# Altium PCB SwimmingPool.PcbDoc
Units mil, origin at the board's own origin, x right, y up, seen from the top; angles counter-clockwise.
Board outline 2482.28 x 2480.58 mil, 2 copper layers (Top Layer, Bottom Layer); 44 components, 29 nets, 173 pads, 74 vias.
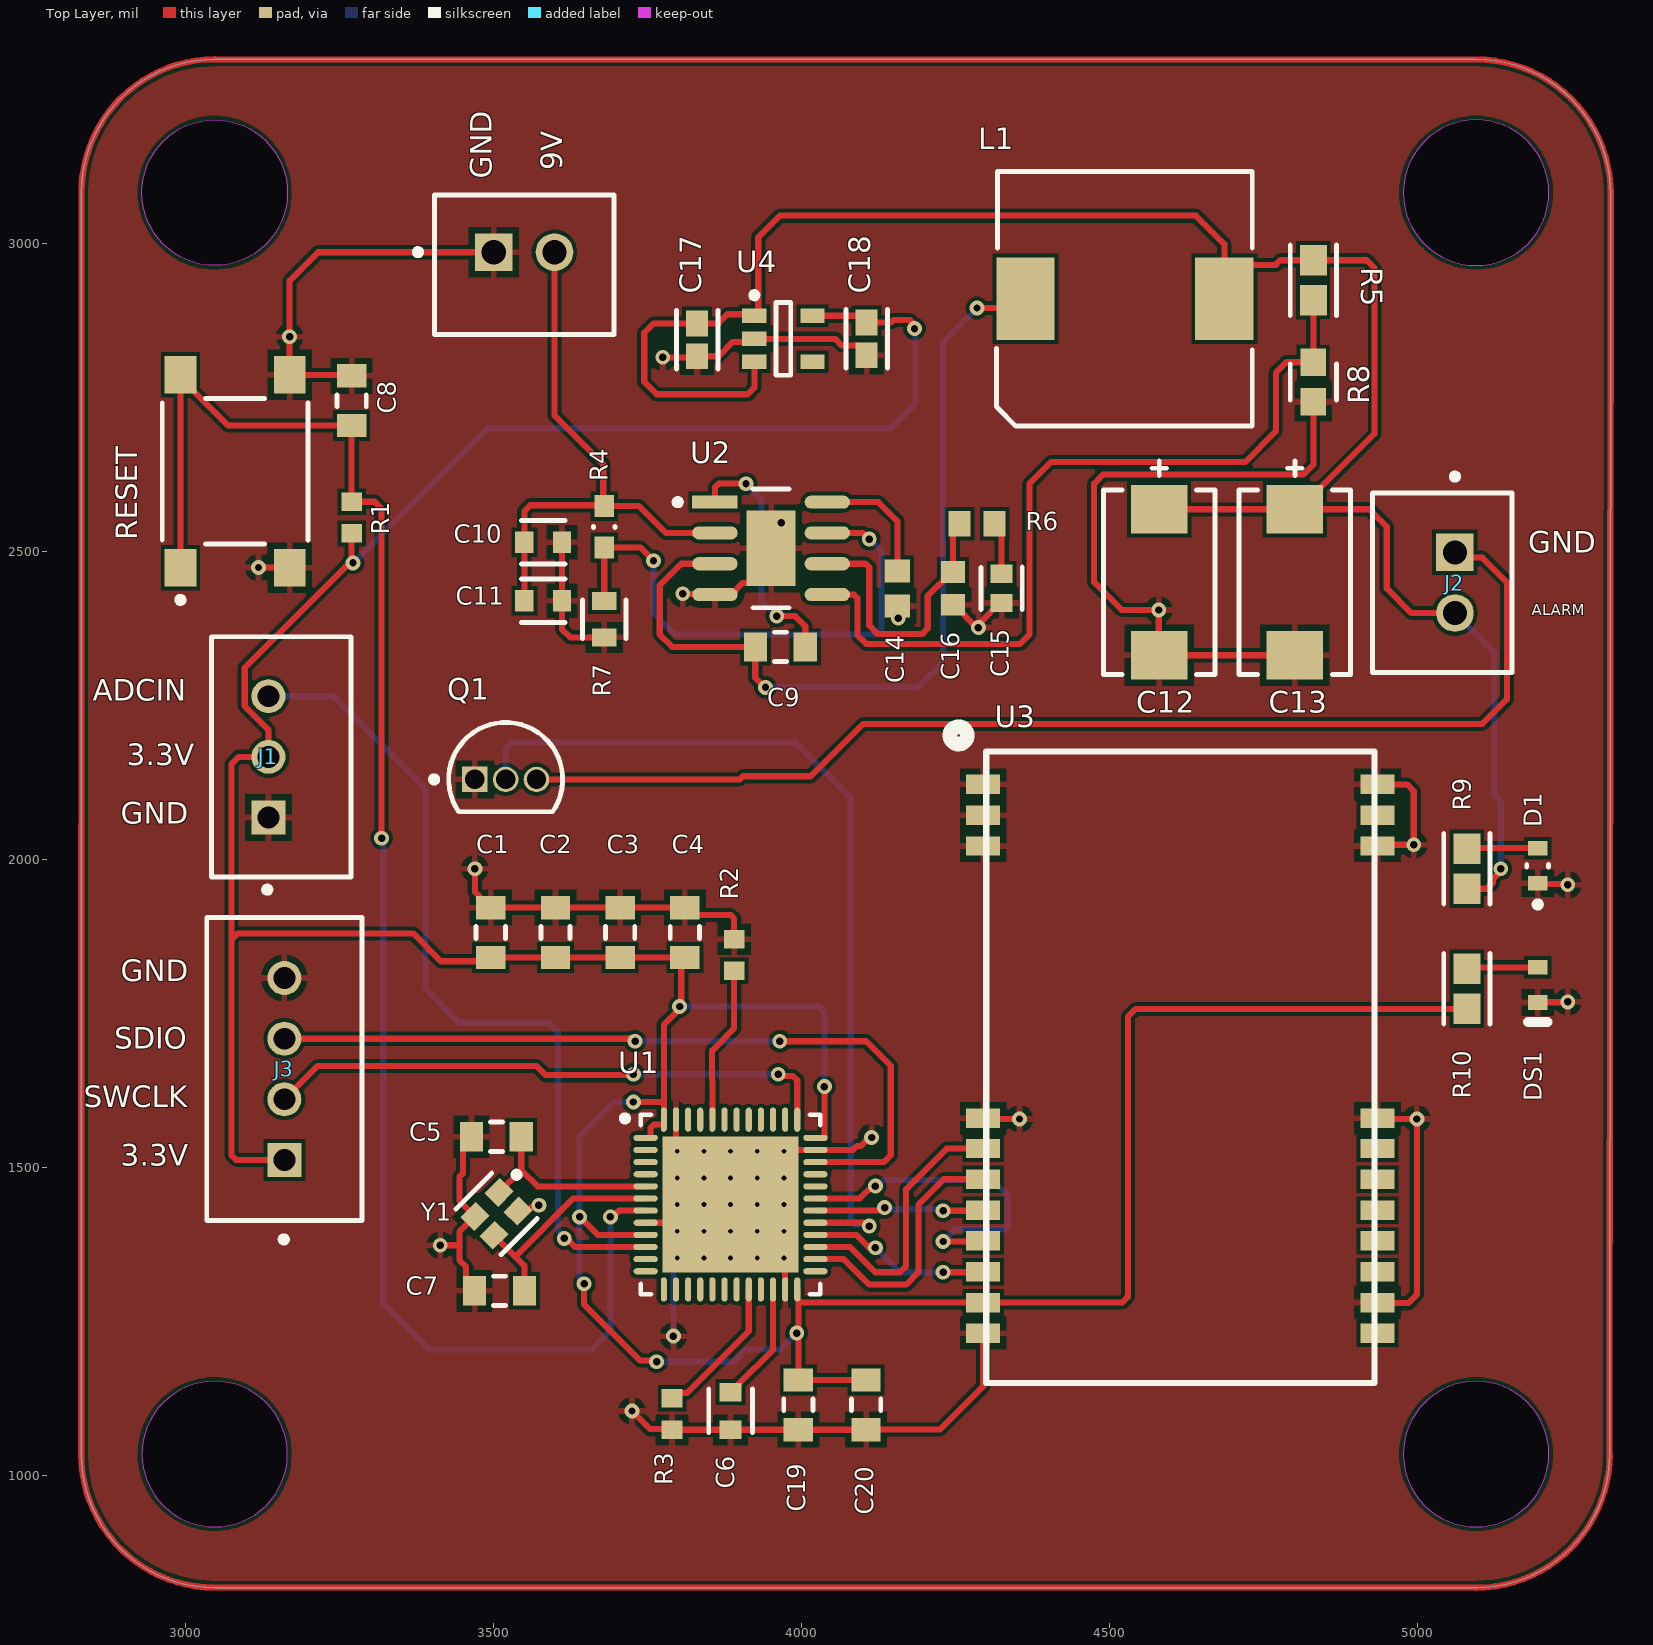
[diagram p0: Top Layer view]
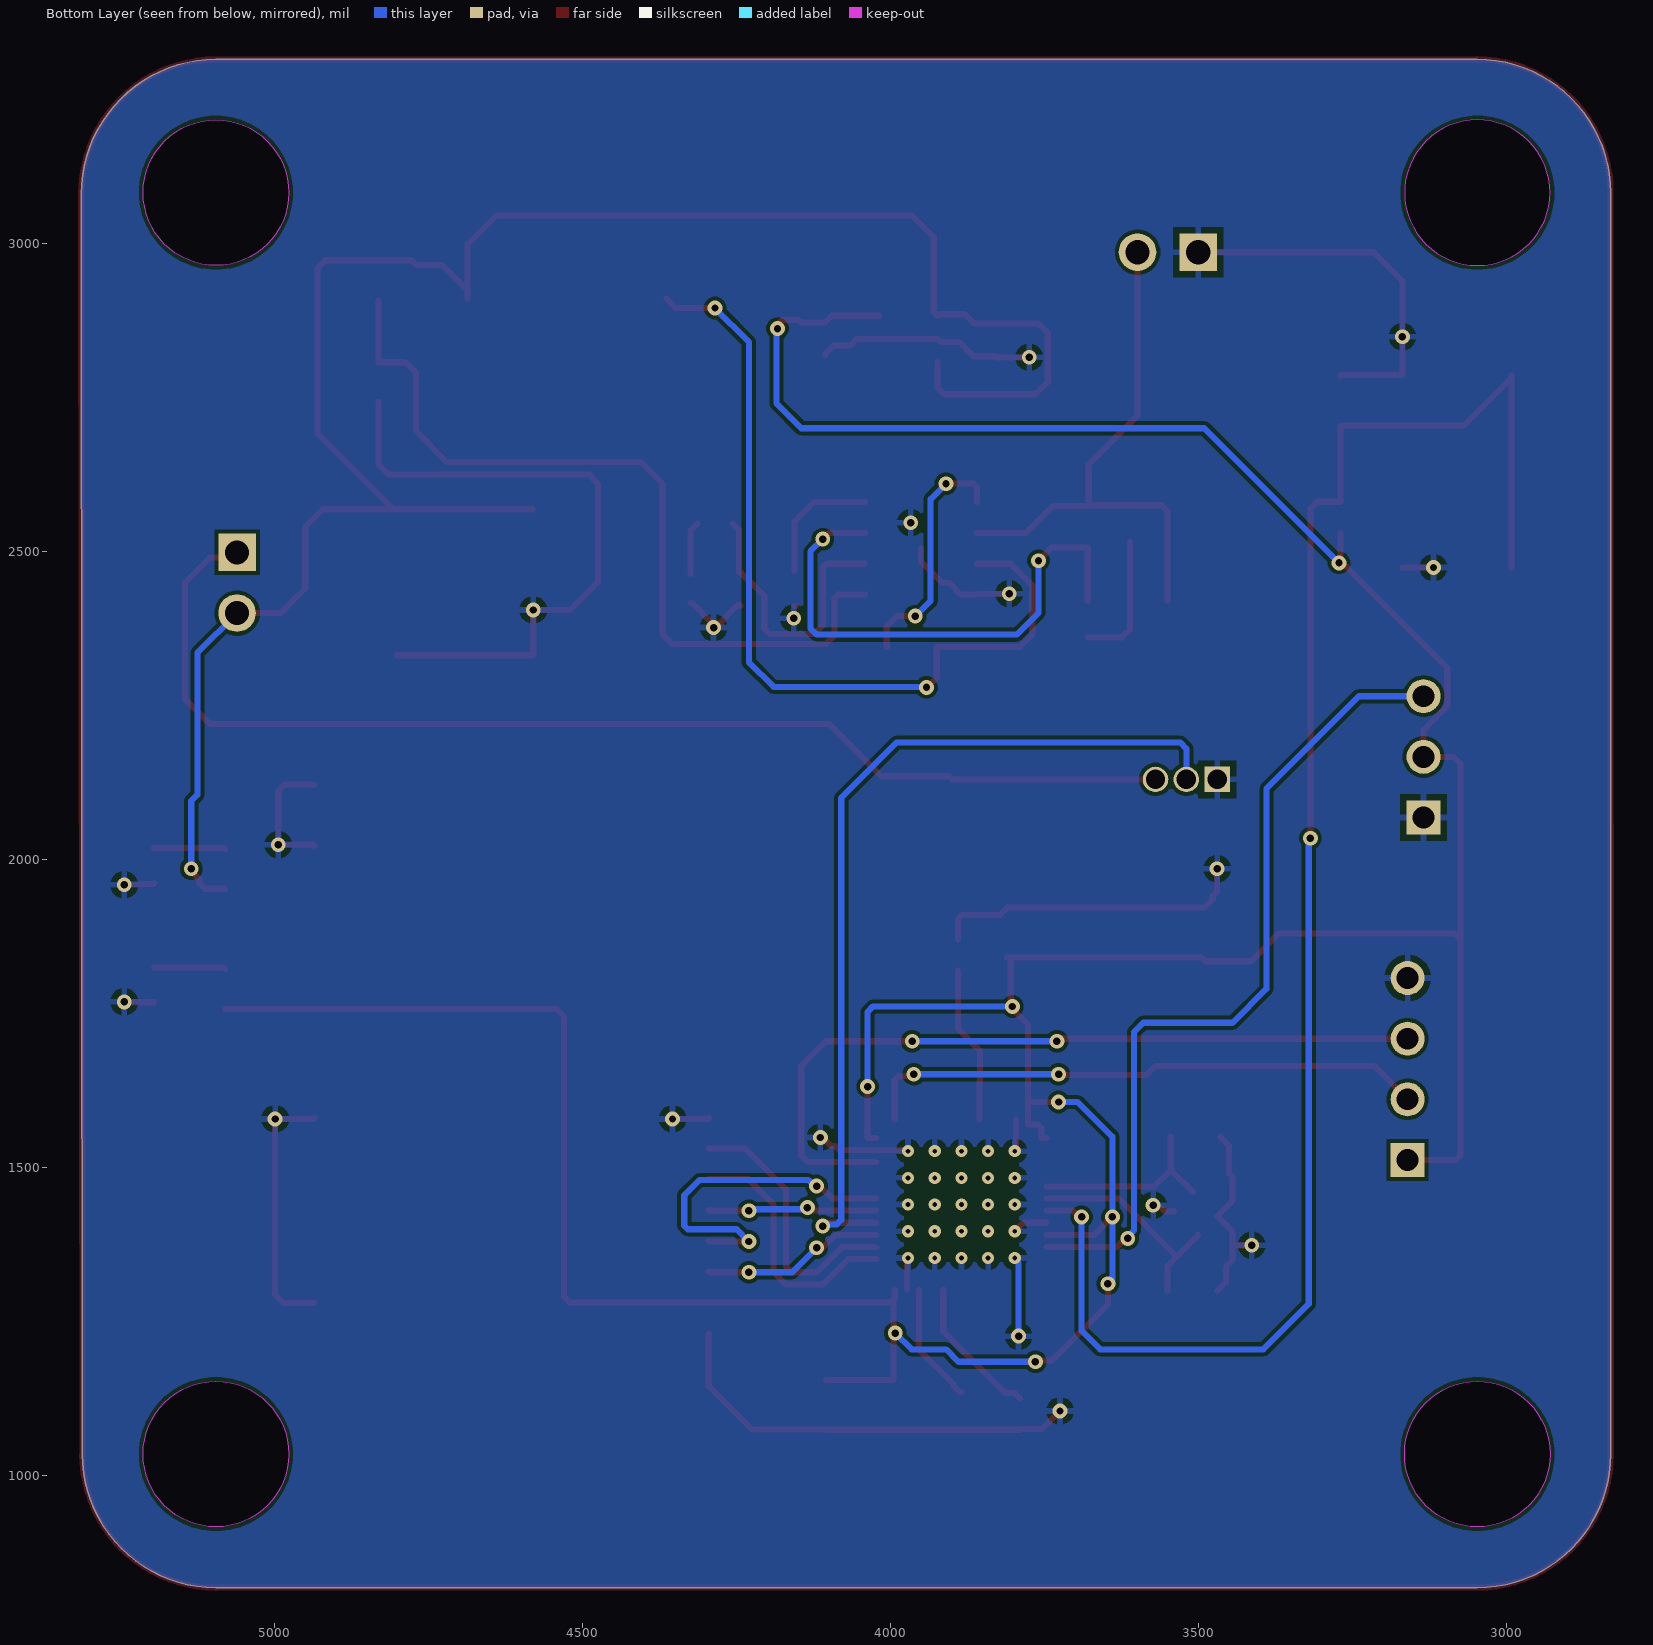
[diagram p1: Bottom Layer view, seen from below]
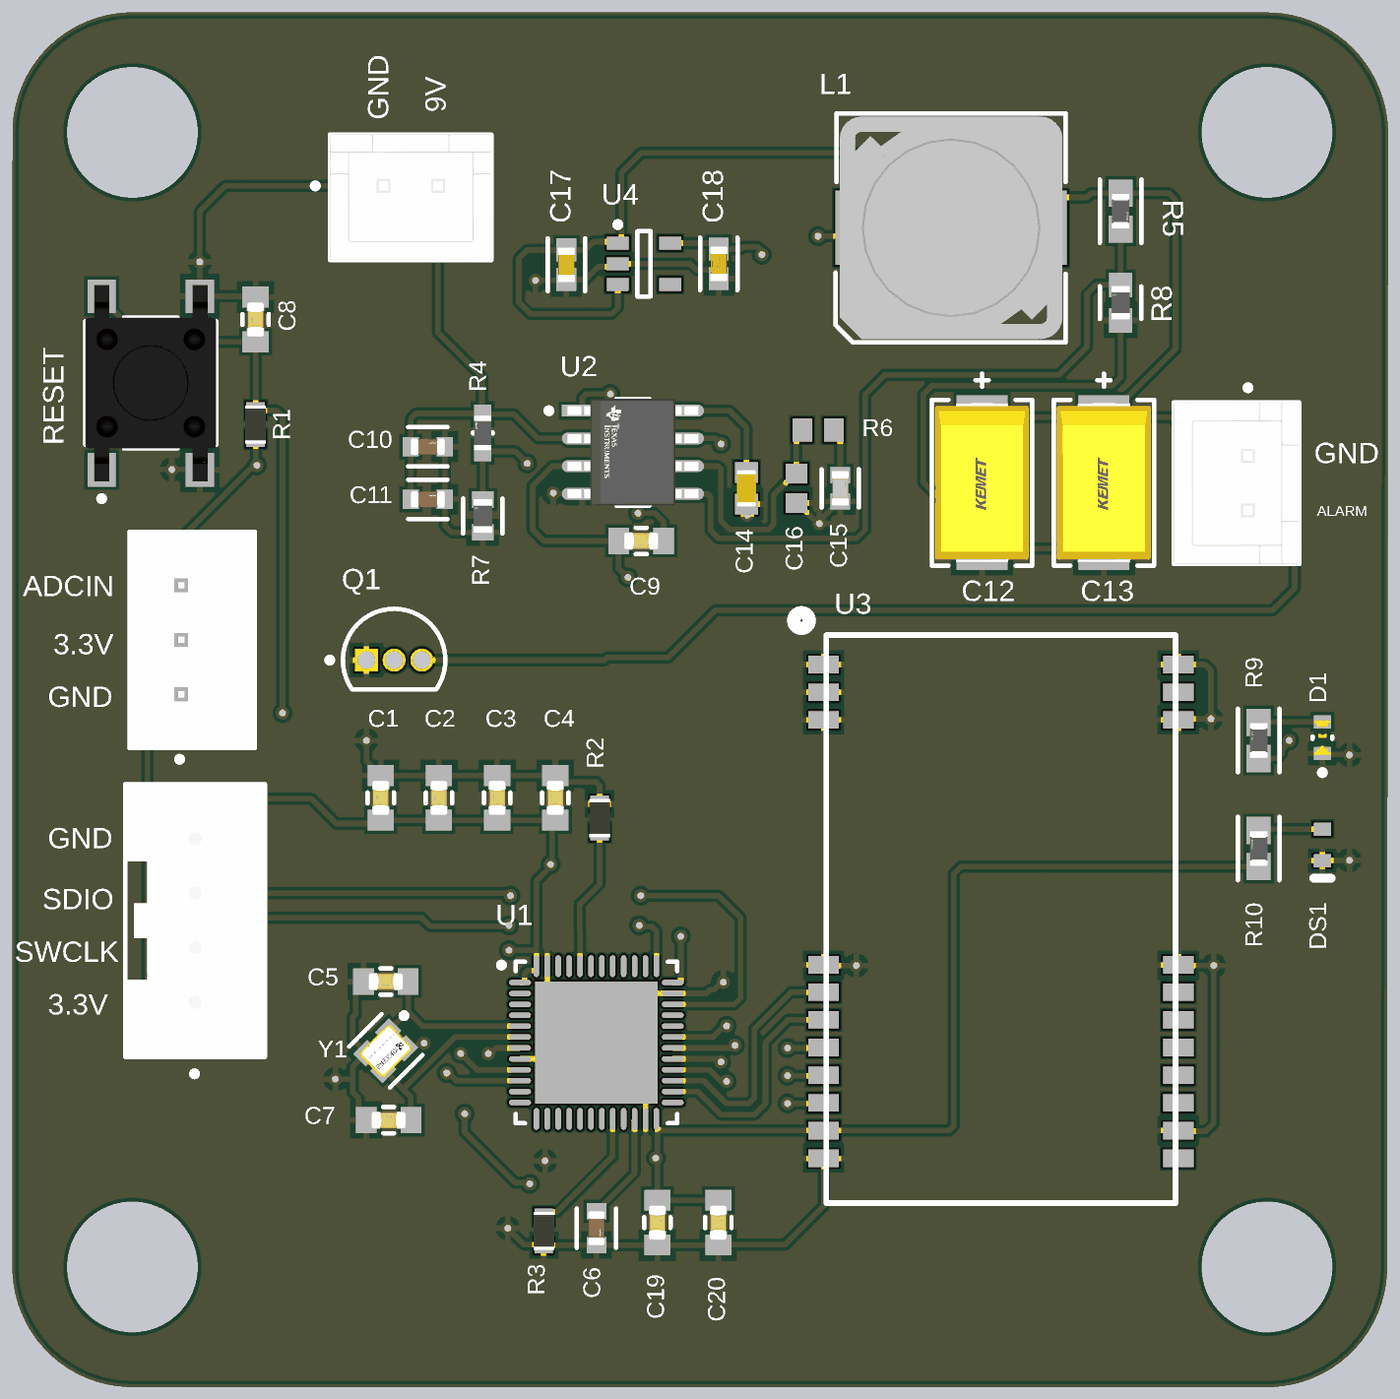
[diagram p2: 3D render of the assembled board from above, using the file's embedded part models]

## Layer stack, top to bottom
Top Solder: solder mask 0.4, Solder Resist, Dk 3.5
Top Layer: signal copper 1.4
Dielectric 1: dielectric 12.6, FR-4, Dk 4.8
Bottom Layer: signal copper 1.4
Bottom Solder: solder mask 0.4, Solder Resist, Dk 3.5

## Board outline
2831.22,1034.71 ccw(c3047.61,1034.71) 3047.61,818.32 5095,818.19 ccw(c5095,1035) 5311.81,1035 5311.53,1035 5313.5,3079.95 ccw(c5094.95,3079.95) 5094.95,3298.5 3048.19,3298.77 ccw(c3048.19,3082.07) 2831.5,3082.07
cut-out: 4976.89,1035 ccw(c5095,1035) 5095,916.89 ccw(c5095,1035) 5213.11,1035 ccw(c5095,1035) 5095,1153.11 ccw(c5095,1035)
cut-out: 3047.76,2964.13 cw(c3047.76,3082.24) 2929.65,3082.24 cw(c3047.76,3082.24) 3047.76,3200.35 cw(c3047.76,3082.24) 3165.87,3082.24 cw(c3047.76,3082.24)
cut-out: 2929.65,1035 ccw(c3047.76,1035) 3047.76,916.89 ccw(c3047.76,1035) 3165.87,1035 ccw(c3047.76,1035) 3047.76,1153.11 ccw(c3047.76,1035)
cut-out: 4976.89,3082.24 ccw(c5095,3082.24) 5095,2964.13 ccw(c5095,3082.24) 5213.11,3082.24 ccw(c5095,3082.24) 5095,3200.35 ccw(c5095,3082.24)

## Design rules (kind name [scope] priority, off if disabled: settings)
Clearance [All] p1: gap=5.98 ignorepadtopadclearanceinfootprint=FALSE except(0: Arc-Hole Track-Hole SMDPad-Hole THPad-Hole Via-Hole Fill-Hole Poly-Hole Region-Hole Text-Hole)
PolygonConnect [All] p1: connectstyle=Relief reliefconductorwidth=10 reliefentries=4 polygonreliefangle="90 Angle" airgapwidth=10
RoutingVias [All] p1: holewidth=12.01 width=24.02 viastyle="Through Hole" minholewidth=12.01 minwidth=24.02 maxholewidth=24 maxwidth=50
SolderMaskExpansion [All] p1: expansion=4 istentingtop=FALSE
Width [All] p1: maxlimit=100 minlimit=5 preferedwidth=10 minimp=50.000000 maximp=50.000000 favimp=50.000000
30 further rules are at their usual default settings.

## Classes and differential pairs
component class TPS54336ADDA: 9V C9 C10 C11 C12 C13 C14 C15 C16 C17 C18 D1 DS1 L1 R4 R5 R6 R7 R8 R9 R10 U2 U4
component class STM32F401: C1 C2 C3 C4 C5 C6 C7 C8 J1 J2 J3 Q1 R1 R2 R3 RESET U1 Y1
component class E49400T20S: C19 C20 U3

## Components (designator, comment, footprint, x,y, rotation, side; value= is the part's Value field where it differs from the comment)
9V "B2B-XH-A(LF)(SN)" FP-B2B-XH-A_LF_SN-MFG 3550,2965 r0 top (schematic designator J4)
C1 "100nF" FP-CGA3E-0_3-0_1-IPC_A 3495.83,1881.5 r90 top
C2 "100nF" FP-CGA3E-0_3-0_1-IPC_A 3600.83,1881.5 r90 top
C3 "100nF" FP-CGA3E-0_3-0_1-IPC_A 3705.83,1881.5 r90 top
C4 "100nF" FP-CGA3E-0_3-0_1-IPC_A 3810.83,1881.5 r90 top
C5 "8pF" FP-CGA3E-0_3-0_1-IPC_A 3505,1550 r180 top
C6 "22uF" FP-GRM188-0_2-MFG 3885,1105 r270 top
C7 "8pF" FP-CGA3E-0_3-0_1-IPC_A 3510,1300 r0 top
C8 "100nF" FP-CGA3E-0_3-0_1-IPC_A 3270,2744.65 r90 top
C9 "100nF" FP-CGA3E-0_3-0_1-IPC_A 3965.83,2345 r180 top
C10 "10uF" FP-GRM188-0_2-MFG 3580.83,2515 r0 top
C11 "10uF" FP-GRM188-0_2-MFG 3580.83,2420 r0 top
C12 "47uf" FP-T491D476K025AT-MFG 4580.83,2450 r90 top
C13 "47uF" FP-T491D476K025AT-MFG 4800.83,2450 r90 top
C14 "10nF" CAPC1608X90X35ML10T15 4155.83,2440 r90 top
C15 "12nF" FP-C0603C-CF-MFG 4325,2440 r270 top value="12,000 pF"
C16 "120pF" CAPC1608X87X35NL15T15 4245.83,2440 r90 top
C17 "1uF" FP-0603-L_1_6_0_1-W_0_8_0-IPC_B 3830.83,2843.34 r90 top
C18 "1uF" FP-0603-L_1_6_0_1-W_0_8_0-IPC_B 4105.83,2845 r90 top
C19 "100nF" FP-CGA3E-0_3-0_1-IPC_A 3995,1115 r270 top
C20 "100nF" FP-CGA3E-0_3-0_1-IPC_A 4105,1115 r270 top
D1 "TLMP1100-GS08" FP-6_541-5056_01-4-MFG 5195,1990 r90 top
DS1 "TLMS1100-GS08" VISH-TLMX1100_V 5195,1796.46 r270 top
J1 "B3B-XH-A(LF)(SN)" FP-B3B-XH-A_LF_SN-MFG 3155.67,2166.57 r90 top
J2 "B2B-XH-A(LF)(SN)" FP-B2B-XH-A_LF_SN-MFG 5040,2449.17 r270 top
J3 "B04B-XASK-1(LF)(SN)" FP-B04B-XASK-1_LF_SN-MFG 3160.83,1660 r270 top
L1 "1.8uH" WE-PDF-1045 4525,2910 r0 top
Q1 "2N3904" ONSC-TO-92-3-29-11 3520,2130 r0 top
R1 "10k" RESC1609X55X30LL15T15 3270,2555 r270 top
R2 "10k" RESC1609X55X30LL15T15 3890.83,1845 r270 top
R3 "10k" RESC1609X55X30LL15T15 3790,1100 r90 top
R4 "100k" FP-RC0603-0_55-MFG 3680,2540 r90 top
R5 "100k" FP-ERA3A-IPC_A 4830.83,2940 r270 top
R6 "3.74k" RESC1608X55X30ML15T15 4285,2545 r180 top
R7 "15k" FP-CRCW0603-e3-MFG 3680,2390 r90 top
R8 "19k" FP-CRCW0603-e3-IPC_A 4830.83,2775 r90 top
R9 "100k" FP-ERA3A-IPC_A 5080,1985 r90 top
R10 "100k" FP-ERA3A-IPC_A 5080,1790 r90 top
RESET "PTS645SH50SMTR92LFS" FP-PTS645SH50SMTR92LFS-MFG 3080.83,2630 r90 top (schematic designator SW1)
U1 "STM32F401CBU6" STM-UFQFPN48_M 3885,1440 r0 top
U2 "TPS54336ADDA" FP-DDA0008E-IPC_C 3950.83,2505 r0 top
U3 "E49400T20S" PCBComponent_1 4615,1676.42 r0 top
U4 "AP7343" SOT95P245X110-5N 3970.83,2845 r0 top
Y1 "CX2016DB40000D0FLJCC" FP-CX2016DB-MFG 3505,1425 r225 top

## Footprints (in the part's own frame and the unit in brackets; to place one, negate y for a bottom-side part, rotate by r counter-clockwise, add the part's x,y. Pads: shape width x height; smd on the part's side, far side on the other; paste and mask are expansions set on the pad)
CAPC1608X87X35NL15T15 [mm] "Chip Capacitor, 2-Leads, Body 1.60x0.80mm, IPC Medium Density"
  rect 0.9x1 smd: 1(-0.675,0) 2(0.675,0)
  body extent -0.87,-0.48 0.87,0.47, height 0.87
CAPC1608X90X35ML10T15 [mm] "Chip Capacitor, 2-Leads, Body 1.7x0.9mm, IPC Low Density"
  rect 0.95x1.05 smd: 1(-0.725,0) 2(0.725,0)
  body extent -0.85,-0.45 0.85,0.45, height 0.9
FP-6_541-5056_01-4-MFG [mm]
  rect 0.6x0.8 smd paste+0 mask+0: 1(-0.725,0) 2(0.725,0)
  silkscreen extent -1.72,-0.45 0.05,0.45, body extent -1.12,-0.55 1.12,0.55, height 0.25
FP-0603-L_1_6_0_1-W_0_8_0-IPC_B [mil]
  rect 41.64x35.91 smd paste+0 mask+0: 1(-26.66,0) 2(26.66,0)
  silkscreen extent -47,-34 47,34, body extent -57,-28 57,28, height 10
FP-B2B-XH-A_LF_SN-MFG [mm]
  rect 1.55x1.55 hole 1 paste-1000 mask+0: 1(-1.25,0.525)
  round 1.55 hole 1 paste-1000 mask+0: 2(1.25,0.525)
  silkscreen extent -4.5,-2.88 3.7,2.88, body extent -3.8,-2.98 3.8,2.98, height 0.25
FP-B3B-XH-A_LF_SN-MFG [mm]
  rect 1.4x1.4 hole 0.9 paste-1000 mask+0: 1(-2.5,0.525)
  round 1.4 hole 0.9 paste-1000 mask+0: 2(0,0.525) 3(2.5,0.525)
  silkscreen extent -5.6,-2.88 4.95,2.88, body extent -5.05,-2.98 5.05,2.98, height 0.25
FP-B04B-XASK-1_LF_SN-MFG [mm]
  rect 1.4x1.4 hole 0.9 paste-1000 mask+0: 1(3.75,0)
  round 1.4 hole 0.9 paste-1000 mask+0: 2(1.25,0) 3(-1.25,0) 4(-3.75,0)
  silkscreen extent -6.25,-3.2 7.15,3.2, body extent -6.35,-3.3 6.35,3.3, height 0.25
FP-C0603C-CF-MFG [mm]
  rect 0.75x0.9 smd paste+0 mask+0: 1(-0.6,0) 2(0.6,0)
  silkscreen extent -0.87,-0.85 0.88,0.85, body extent -1.2,-0.6 1.2,0.6, height 0.25
FP-CGA3E-0_3-0_1-IPC_A [mm]
  rect 0.956x1.206 smd paste+0 mask+0: 1(-1.025,0) 2(1.025,0)
  silkscreen extent -0.25,-0.6 0.25,0.6, body extent -2,-1.1 2,1.1, height 0.25
FP-CRCW0603-e3-IPC_A [mil]
  rect 44.69x41.82 smd paste+0 mask+0: 1(-32.1,0) 2(32.1,0)
  silkscreen extent -30,-37 30,37, body extent -74,-41 74,41, height 10
FP-CRCW0603-e3-MFG [mm]
  rect 0.75x1 smd paste+0 mask+0: 1(-0.75,0) 2(0.75,0)
  silkscreen extent -0.8,-0.9 0.8,0.9, body extent -1.22,-0.6 1.22,0.6, height 0.25
FP-CX2016DB-MFG [mm]
  rect 0.9x0.8 smd paste+0 mask+0: 1(-0.7,-0.55) 2(0.7,-0.55) 3(0.7,0.55) 4(-0.7,0.55)
  silkscreen extent -1.85,-1.33 1.05,1.33, body extent -1.25,-1.05 1.25,1.05, height 0.25
FP-DDA0008E-IPC_C [mm]
  rect 1.874x0.542 smd paste+0 mask+0: 1(-2.316,1.905)
  rrect100% 1.874x0.542 smd paste+0 mask+0: 2(-2.316,0.635) 3(-2.316,-0.635) 4(-2.316,-1.905) 5(2.316,-1.905) 6(2.316,-0.635) 7(2.316,0.635) 8(2.316,1.905)
  rect 2.025x3.1 smd paste-1000 mask+0: 9(0,0)
  silkscreen extent -3.97,-2.45 0.75,2.45, body extent -3.35,-2.55 3.35,2.55, height 0.25
FP-ERA3A-IPC_A [mil]
  rect 49.41x43.55 smd paste+0 mask+0: 1(-32.51,0) 2(32.51,0)
  silkscreen extent -57,-38 57,38, body extent -77,-41 77,41, height 10
FP-GRM188-0_2-MFG [mm]
  rect 0.75x0.9 smd paste+0 mask+0: 1(-0.775,0) 2(0.775,0)
  silkscreen extent -0.9,-0.9 0.9,0.9, body extent -1.25,-0.6 1.25,0.6, height 0.25
FP-PTS645SH50SMTR92LFS-MFG [mm]
  rect 1.55x1.3 smd paste+0 mask+0: 1(-3.975,2.25) 2(3.975,2.25) 3(-3.975,-2.25) 4(3.975,-2.25)
  silkscreen extent -5.42,-3 3,3, body extent -4.85,-3.1 4.85,3.1, height 0.25
FP-RC0603-0_55-MFG [mm]
  rect 0.9x0.8 smd paste+0 mask+0: 1(-0.85,0) 2(0.85,0)
  silkscreen extent -0.03,-0.45 0.03,0.45, body extent -1.4,-0.55 1.4,0.55, height 0.25
FP-T491D476K025AT-MFG [mm]
  rect 1.99x2.33 smd paste+0 mask+0: 1(-3.01,0) 2(3.01,0)
  silkscreen extent -3.8,-2.3 5,2.3, body extent -4.13,-2.42 4.13,2.42, height 0.25
ONSC-TO-92-3-29-11 [mm] "TO, 3-Leads, Body Dia 4.7mm, Pitch 1.27mm"
  rect 1.05x1.05 hole 0.8: 1(-1.27,0)
  round 1.05 hole 0.8: 2(0,0) 3(1.27,0)
  silkscreen extent -3.07,-1.34 2.35,2.35, body extent -2.35,-1.33 2.36,2.36, height 7.87
PCBComponent_1 [mm]
  rect 1.4x0.8 smd: 1(-8.128,11.315) 2(-8.128,10.045) 3(-8.128,8.775) 4(-8.128,-2.449) 5(-8.128,-3.695) 6(-8.128,-4.965) 7(-8.128,-6.235) 8(-8.128,-7.505) 9(-8.128,-8.775) 10(-8.128,-10.045) 11(-8.128,-11.315) 12(8.128,-11.315) 13(8.128,-10.045) 14(8.128,-8.775) 15(8.128,-7.505) 16(8.128,-6.235) 17(8.128,-4.965) 18(8.128,-3.695) 19(8.128,-2.449) 20(8.128,8.775) 21(8.128,10.045) 22(8.128,11.315)
  silkscreen extent -9.5,-13.37 8,13.69
RESC1608X55X30ML15T15 [mm] "Chip Resistor, 2-Leads, Body 1.60x0.80mm, IPC Low Density"
  rect 0.9x1.05 smd: 1(-0.725,0) 2(0.725,0)
  body extent -0.87,-0.48 0.87,0.48, height 0.55
RESC1609X55X30LL15T15 [mm] "Chip Resistor, 2-Leads, Body 1.75x0.95mm, IPC High Density"
  rect 0.75x0.85 smd: 1(-0.65,0) 2(0.65,0)
  body extent -0.87,-0.48 0.87,0.48, height 0.55
SOT95P245X110-5N [mm] "SOT23, 5-Leads, Body 2.90x2.45mm, Pitch 0.95mm, IPC Medium Density"
  rect 1x0.6 smd: 1(-1.2,0.95) 2(-1.2,0) 3(-1.2,-0.95) 4(1.2,-0.95) 5(1.2,0.95)
  silkscreen extent -1.32,-1.5 0.3,1.92, body extent -0.7,-1.5 0.7,1.5, height 1.1
STM-UFQFPN48_M [mm] "QFN, 48-Leads, Body 7.1x7.1mm, Pitch 0.5mm, Thermal Pad 5.6x5.6mm, IPC Low Density"
  oval 1x0.25 smd: 1(-3.5,2.75) 2(-3.5,2.25) 3(-3.5,1.75) 4(-3.5,1.25) 5(-3.5,0.75) 6(-3.5,0.25) 7(-3.5,-0.25) 8(-3.5,-0.75) 9(-3.5,-1.25) 10(-3.5,-1.75) 11(-3.5,-2.25) 12(-3.5,-2.75) 25(3.5,-2.75) 26(3.5,-2.25) 27(3.5,-1.75) 28(3.5,-1.25) 29(3.5,-0.75) 30(3.5,-0.25) 31(3.5,0.25) 32(3.5,0.75) 33(3.5,1.25) 34(3.5,1.75) 35(3.5,2.25) 36(3.5,2.75)
  oval 0.25x1 smd: 13(-2.75,-3.5) 14(-2.25,-3.5) 15(-1.75,-3.5) 16(-1.25,-3.5) 17(-0.75,-3.5) 18(-0.25,-3.5) 19(0.25,-3.5) 20(0.75,-3.5) 21(1.25,-3.5) 22(1.75,-3.5) 23(2.25,-3.5) 24(2.75,-3.5) 37(2.75,3.5) 38(2.25,3.5) 39(1.75,3.5) 40(1.25,3.5) 41(0.75,3.5) 42(0.25,3.5) 43(-0.25,3.5) 44(-0.75,3.5) 45(-1.25,3.5) 46(-1.75,3.5) 47(-2.25,3.5) 48(-2.75,3.5)
  rect 5.6x5.6 smd: 49(0,0)
  silkscreen extent -4.47,-3.7 3.7,3.7, body extent -3.55,-3.55 3.55,3.55, height 0.6
VISH-TLMX1100_V [mm] "SMD, 2-Leads, Body 1.6x0.8mm"
  rect 0.6x0.8 smd: 1(-0.725,0) 2(0.725,0)
  silkscreen extent 1.53,-0.4 1.53,0.4, body extent -0.8,-0.4 0.8,0.4, height 0.65
WE-PDF-1045 [mm] "SMD Inductor, 2-Leads, Body 10.2 x 10.2 mm"
  rect 2.4x3.4 smd: 1(-4.1,0) 2(4.1,0)
  silkscreen extent -5.3,-5.25 5.25,5.25, body extent -5.1,-5.1 5.1,5.1, height 4.49

## Part data
9V J2: library part CMP-2000-05888-3, "CONN HEADER VERT 2POS 2.5MM", Color=Natural, Contact Resistance=20mR, Current Rating=3A, Housing Color=White, Insulation Resistance=1GR, Max Operating Temperature=85°C, Max Voltage Rating (AC)=250V, Min Operating Temperature=-25°C, Connector Type="Male Pin", Contact Material=Brass, Contact Plating=Tin, Contact Type="Male Pin", Depth=5.75mm, Fastening Type=Detent, Housing Material=Polyamide, Lead Free="Lead Free", Lead Pitch=2.5mm, Length=7.4mm, Max Current Rating=3A, Max Voltage Rating (DC)=250V, Mount="Through Hole", Number of Contacts=2, Number of Positions=2, Number of Rows=1, Orientation=Straight, Packaging=Bulk, Pitch=2.5mm, REACH SVHC="No SVHC", Series=XH, Termination=Solder, Voltage Rating=250V, Voltage Rating (AC)=250V, Wire/Cable Gauge=22AWG
C1 C2 C3 C4 C8 C9 C19 C20: library part CMP-2000-07546-2, "Cap Ceramic 100nF 50V X7R 10% Pad SMD 0603 +125°C Automotive T/R", Case Code (Imperial)=0603, Case Code (Metric)=1608, Dielectric=X7R, Max Operating Temperature=125°C, Min Operating Temperature=-55°C, Package Quantity=1, Ratings=AEC-Q200, Tolerance=10%, Voltage=50V, Capacitance=100nF, Case/Package=0603, Composition=Ceramic, Depth=0.8mm, Height=0.8mm, Lead Free="Lead Free", Length=1.6mm, Mount="Surface Mount", Packaging="Tape and Reel", Radiation Hardening=No, REACH SVHC="No SVHC", Termination=SMD/SMT, Thickness=0.035inch, Voltage Rating=50V, Voltage Rating (DC)=50V, Weight=7.1E-05oz, Width=0.8mm
C5 C7: library part CMP-08246-000516-1, "Cap Ceramic 8pF 50V C0G 0.5pF Pad SMD 0603 +125°C Automotive T/R", Case Code (Imperial)=0603, Case Code (Metric)=1608, Dielectric=C0G, Max Operating Temperature=125°C, Min Operating Temperature=-55°C, Package Quantity=4000, Ratings=AEC-Q200, Voltage Rating=50V, Capacitance=8pF, Case/Package=0603, Composition=Ceramic, Depth=0.8mm, Height=0.8mm, Length=1.6mm, Mount="Surface Mount", Packaging="Tape and Reel", Radiation Hardening=No, REACH SVHC="No SVHC", Termination=SMD/SMT, Thickness=0.035inch, Voltage Rating (DC)=50V, Weight=7.1E-05oz, Width=0.031inch
C6: library part CMP-2000-06337-3, "Chip Multilayer Ceramic Capacitors for General Purpose, 0603, 22uF, X5R, 15%, 20%, 10V", Case Code (Imperial)=0603, Case Code (Metric)=1608, Dielectric=X5R, Max Operating Temperature=85°C, Min Operating Temperature=-55°C, Package Quantity=4000, Tolerance=20%, Voltage Rating=10V, Capacitance=22uF, Case/Package=0603, Depth=0.8mm, Height=0.8mm, Lead Free="Lead Free", Length=1.6mm, Material=Ceramic, Mount="Surface Mount", Packaging="Tape and Reel", REACH SVHC="No SVHC", Termination=SMD/SMT, Thickness=0.039inch, Voltage Rating (DC)=10V, Weight=0.000222oz, Width=0.8mm
C10 C11: library part CMP-2006-02520-2, "Chip Multilayer Ceramic Capacitors for General Purpose, 0603, 10uF, X5R, 15%, 20%, 25V", Case Code (Imperial)=0603, Case Code (Metric)=1608, Dielectric=X5R, Max Operating Temperature=85°C, Min Operating Temperature=-55°C, Package Quantity=1, Resistor Type=Ceramic, Tolerance=20%, Voltage=25V, Capacitance=10uF, Case/Package=0603, Depth=0.8mm, Height=0.8mm, Lead Free="Lead Free", Length=1.6mm, Mount="Surface Mount", Number of Pins=2, Packaging="Tape and Reel", REACH SVHC="No SVHC", Termination=SMD/SMT, Thickness=0.031inch, Voltage Rating=25V, Voltage Rating (DC)=25V, Weight=0.000222oz, Width=0.031inch
C12: library part CMP-03017-000020-1, "CAP TANT 47UF 10% 25V 2917", Capacitance=47uF, Case Code (Imperial)=2917, Case Code (Metric)=7343, Dielectric Material=Tantalum, ESR (Equivalent Series Resistance)=700mR, Leakage Current=11.8uA, Max Operating Temperature=125°C, Min Operating Temperature=-55°C, Package Quantity=1, Ripple Current=463mA, Tolerance=10%, Voltage=25V, Case/Package=2917, Depth=4.3mm, Dissipation Factor=10%, Failure Rate=0.001%, Features="General Purpose", Height=2.8mm, Height - Seated (Max)=0.122inch, Lead Free="Lead Free", Length=7.3mm, Life (Hours)=2000Hour, Mount="Surface Mount", Number of Pins=2, Packaging="Tape and Reel", Polarity=Polar, Radiation Hardening=No, REACH SVHC="No SVHC", RoHS Compliant=Yes, Termination=SMD/SMT, Voltage Rating=25V, Voltage Rating (DC)=25V, Weight=0.023634oz, Width=4.3mm
C13: library part CMP-03017-000020-1, "CAP TANT 47UF 10% 25V 2917", Case Code (Imperial)=2917, Case Code (Metric)=7343, Dielectric Material=Tantalum, ESR (Equivalent Series Resistance)=700mR, Leakage Current=11.8uA, Max Operating Temperature=125°C, Min Operating Temperature=-55°C, Package Quantity=1, Ripple Current=463mA, Tolerance=10%, Voltage=25V, Capacitance=47uF, Case/Package=2917, Depth=4.3mm, Dissipation Factor=10%, Failure Rate=0.001%, Features="General Purpose", Height=2.8mm, Height - Seated (Max)=0.122inch, Lead Free="Lead Free", Length=7.3mm, Life (Hours)=2000Hour, Mount="Surface Mount", Number of Pins=2, Packaging="Tape and Reel", Polarity=Polar, Radiation Hardening=No, REACH SVHC="No SVHC", RoHS Compliant=Yes, Termination=SMD/SMT, Voltage Rating=25V, Voltage Rating (DC)=25V, Weight=0.023634oz, Width=4.3mm
C14: library part CMP-2100-03642-1, "Chip Capacitor, 10 nF, +/- 10%, 50 V, -55 to 125 degC, 0603 (1608 Metric), RoHS, Tape and Reel", Case Code (Imperial)=0603, Case Code (Metric)=1608, Dielectric=X7R, Dielectric Material=Ceramic, Insulation Resistance=10GR, Manufacturer=Murata, Max Operating Temperature=125degC, Min Operating Temperature=-55degC, Package Description="2-Pin Surface Mount Device, Body 1.6 x 0.8 mm", Package Quantity=1, Tolerance=10%, Voltage=50V, Capacitance=10nF, Case/Package=0603, Datasheet URL=http://search.murata.co.jp/Ceramy/image/img/A01X/G101/ENG/GRM188R71H103KA01-01.pdf, Datasheet Version=42401.0, Depth=0.8mm, Height=0.8mm, Lead Free=LeadFree, Length=1.6mm, Manufacturer URL=http://www.murata.com/, Material=Ceramic, Mount=SurfaceMount, Number of Pins=2, Package Reference=0603, Packaging=TapeandReel, REACH SVHC=Unknown, RoHSCompliant=True, Termination=SMD/SMT, Thickness=0.035inch, Voltage Rating=50V, Voltage Rating (DC)=50V, Width=0.031inch
C15: library part CMP-2006-02245-2, "CAP CER 0.012UF 50V 10% X7R 0603", Capacitance="12,000 pF", Manufacturer=KEMET, Manufacturer Part Number=C0603C123K5RACTU, Package=C0603C-CF, Temperature="-55°C to +125°C", Temperature Characteristic=X7R, Temperature Coefficient=30ppm/°C, Temperature Range High=+125°C, Temperature Range Low=-55°C, Tolerance=0.1, Voltage Rating="50 V", Automotive=Yes, Automotive Grade="Grade 1", Category=Cap, ComponentLink2Description=Datasheet, ComponentLink2URL=https://api.kemet.com/component-edge/download/datasheet/C0603C100J5GACAUTO.pdf, Device Class L1="Passive Components", Device Class L2=Capacitors, Device Class L3="Ceramic Capacitors", Digikey Description="CAP CER 0.012UF 50V 10% X7R 0603", Height=0.87mm, Lead Free=Yes, Material=Ceramic, Mouser Description="Multilayer Ceramic Capacitors MLCC - SMD/SMT 50volts 12000pF X7R 10%", Octopart=https://octopart.com/c0603c123k5ractu-kemet-9143719, RoHS=TRUE
C16: library part CMP-2006-03074-1, Manufacturer=Kemet, Part Number=C0603C121J5GACTU
C17 C18: library part CMP-2000-05447-3, "None", Case Code (Imperial)=0603, Case Code (Metric)=1608, Dielectric=X5R, Max Operating Temperature=85°C, Min Operating Temperature=-55°C, Package Quantity=1, Tolerance=10%, Voltage Rating=50V, Capacitance=1uF, Case/Package=0603, Construction=Flat, Contact Plating=Nickel, Depth=0.8mm, Halogen Free="Halogen Free", Height=0.8mm, Length=1.6mm, Mount="Surface Mount", Number of Pins=2, Packaging="Tape and Reel", Radiation Hardening=No, RoHS Compliant=Yes, Series=M, Termination=SMD/SMT, Thickness=0.035inch, Voltage Rating (DC)=50V, Width=0.031inch
D1: library part CMP-02520-000009-1, "LED GREEN 0603 SMD", Ambient Temperature Range High=+100°C, Ambient Temperature Range Low=-40°C, Colour="Pure green", Forward Current=20mA, Forward Voltage=2.1V, Manufacturer=Vishay, Max Junction Temp=+120°C, Package=6.541-5056.01-4, Power Dissipation=90mW, Reverse Voltage=6V, Temperature="to +120°C", Automotive=Yes, Automotive Grade="Grade 3", Category=Diode, ComponentLink2Description=Datasheet, ComponentLink2URL=http://www.vishay.com/docs/83173/tlmb1100.pdf, Device Class L1=Optoelectronics, Device Class L2=LEDs, Device Class L3=unset, Digikey Description="LED GREEN 0603 SMD", Height=0.65mm, Lead Free=Yes, Led Orientation="Top View", Luminous Intensity=15mcd, Manufacturer Part Number=TLMP1100-GS08, Mouser Description="Standard LEDs - SMD Pure Green", Octopart=https://octopart.com/tlmp1100-gs08-vishay-55433993, Peak Emmision Wavelength=562nm, RoHS=TRUE, Temperature Range High=+120°C, Viewing Angle=160°, Wavelength=561nm
DS1: library part CMP-1666-00027-1, "LED, RED, 2.1 V, -40 to 100 degC, 2-Pin SMD (0603), RoHS, Tape and Reel", Capacitance="12 pF", Case Code (Imperial)=0603, Case Code (Metric)=1608, Max Operating Temperature=125degC, Min Operating Temperature=-55degC, Package Quantity=4000, Resistance="100000000000 Ohm", Tolerance=5%, Type (Capacitors)=C0G, Voltage Rating="50 V", Case/Package=0603, ComponentLink1Description="Manufacturer URL", ComponentLink1URL=http://www.vishay.com/, ComponentLink2Description=Datasheet, ComponentLink2URL=http://www.vishay.com/docs/83173/tlmb1100.pdf, DatasheetVersion="Rev. 2.7, 03/2016", Height="0.8 mm", Length="1.6 mm", Mount="Surface Mount", PackageDescription="2-Pin Surface Mount Device, Body 1.6 x 0.8 mm", PackageReference=TLMX1100, Packaging="Tape and Reel", Pins=2, Radiation Hardening=No, REACH SVHC="No SVHC", RoHSCompliant=True, Voltage Rating (DC)="50 V", Width="0.8 mm"
J1: library part CMP-17439-000014-3, "CONN HEADER VERT 3POS 2.5MM", Color=Natural, Contact Resistance=20mR, Current Rating=3A, Flammability Rating="UL94 V-0", Housing Color=White, Insulation Resistance=1GR, Max Operating Temperature=85°C, Max Voltage Rating (AC)=250V, Min Operating Temperature=-25°C, Connector Type=Header, Contact Finish - Mating=TIN, Contact Material=Brass, Contact Plating=Tin, Contact Shape=Square, Contact Type="Male Pin", Depth=5.75mm, Fastening Type=Detent, Gender=Male, Housing Material=Polyamide, Insulation Color=Natural, Insulation Material=Nylon, Lead Free="Lead Free", Lead Pitch=2.5mm, Length=9.9mm, Max Current Rating=3A, Max Voltage Rating (DC)=250V, Mount="Through Hole", Number of Contacts=3, Number of Positions=3, Number of Rows=1, Orientation=Straight, Packaging=Bulk, Pitch=2.5mm, REACH SVHC="No SVHC", Series=XH, Termination=Solder, Voltage Rating=250V, Voltage Rating (AC)=250V, Wire/Cable Gauge=22AWG
J3: library part CMP-17439-000018-1, "CONN HEADER VERT 4POS 2.5MM", Current Rating=3A, Manufacturer=JST, Temperature="-25°C to +85°C", Temperature Range High=+85°C, Temperature Range Low=-25°C, Voltage Rating=250V, Automotive=No, Category=Conn, ComponentLink2Description=Datasheet, ComponentLink2URL=http://www.jst-mfg.com/product/pdf/eng/eXA1.pdf, Conn Gender=Male, Conn Orientation=Straight, Contact Material=Tin,Copper, Device Class L1=Connectors, Device Class L2="Headers and Wire Housings", Device Class L3=unset, Digikey Description="CONN HEADER VERT 4POS 2.5MM", Height=8.8mm, Lead Free=Yes, Manufacturer Part Number=B04B-XASK-1(LF)(SN), Number of Contacts=4, Number of Rows=1, Octopart=https://octopart.com/b04b-xask-1%28lf%29%28sn%29-jst-3990149, Package=B04B-XASK-1(LF)(SN), Pitch=2.5mm, RoHS=TRUE
L1: library part CMP-0227-00049-1, "SMD Power Inductor WE-PDF, L = 1.80 µH", Inductance="1.80 ÂµH", ComponentLink1Description="Manufacturer Link", ComponentLink1URL=http://www.we-online.com, ComponentLink2Description=Datasheet, ComponentLink2URL=http://www.we-online.de/katalog/media/pdf/7447797180.pdf, DatasheetVersion="ver 2, Jul-2009", PackageDescription="SMD Inductor, 2-Leads, Body 10.2 x 10.2 mm", PackageReference=WE-PDF-1045, PackageVersion=2009
Q1: library part CMP-2000-05562-1, "General Purpose Transistor, NPN Silicon, 200 mA, 60 V, -55 to 150 degC, 3-Pin TO-92, RoHS, Bulk", Collector- Base Voltage VCBO=60V, Collector- Emitter Voltage VCEO Max=40V, Collector-Emitter Saturation Voltage=0.3V, Emitter- Base Voltage VEBO=6V, Manufacturer=ONSemiconductor, Maximum DC Collector Current=0.2A, Maximum Operating Temperature=+150C, Maximum Power Dissipation=625mW, Minimum Operating Temperature=-65C, Package / Case=TO-92-3(TO-226), Package Description="3-Pin Transistor Outline, Body 4.825 x 3.685 mm, Pitch 1.27 mm", Package Reference=TO-92-3-29-11, Brand=ONSemiconductor, Configuration=Single, Datasheet URL=https://datasheet.ciiva.com/4725/2n3903-d-285841-4725808.pdf, Datasheet Version="Rev. 8, 08/2012", DC Collector/Base Gain hfe Min=60, Factory Pack Quantity=5000, Gain Bandwidth Product fT=270MHz, Manufacturer URL=http://www.onsemi.com/, Mounting Style=ThroughHole, Mounting Technology=ThroughHole, Packaging=Bulk, Product Category=BipolarTransistors-BJT, RoHS=Details, Transistor Polarity=NPN
R1 R2 R3: library part CMP-1012-00623-3, "Chip Resistor, 10 KOhm, +/- 1%, 0.1 W, -55 to 155 degC, 0603 (1608 Metric), RoHS, Tape and Reel", Case Code (Imperial)=0603, Case Code (Metric)=1608, Manufacturer=Panasonic, Max Operating Temperature=155degC, Max Power Dissipation=100mW, Min Operating Temperature=-55degC, Package Description="2-Pin Surface Mount Device, Body 1.6 x 0.85 mm", Package Quantity=1, Package Reference=603, Resistance=10KOhm, Temperature Coefficient=100ppm\/degreesC, Tolerance=1%, Voltage Rating=75V, Case\/Package=0603, Composition=ThickFilm, Contact Plating=Tin, Datasheet URL=https://industrial.panasonic.com/cdbs/www-data/pdf/RDA0000/AOA0000C304.pdf, Datasheet Version=02/2017, Depth=0.8mm, Height=0.45mm, Lead Free=LeadFree, Length=1.6mm, Manufacturer URL=http://www.panasonic.com/, Military Standard=Not, Mount=SurfaceMount, Mounting Technology=SurfaceMount, Number of Pins=2, Number of Terminations=2, Packaging=TapeandReel, Power Rating=100mW, Radiation Hardening=No, REACH SVHC=NoSVHC, RoHSCompliant=true, Termination=SMD/SMT, Voltage Rating (DC)=75V, Width=0.031inch
R4: library part CMP-2100-03662-2, "RES SMD 100K OHM 1% 1/10W 0603", Case Code (Imperial)=0603, Case Code (Metric)=1608, Max Operating Temperature=155°C, Max Power Dissipation=100mW, Min Operating Temperature=-55°C, Resistance=100kR, Resistance Tolerance=1%, Resistor Type="Thick Film", Temperature Coefficient=100ppm/°C, Voltage Rating=50V, Working Voltage=75V, Case/Package=0603, Construction=Rectangular, Depth=0.8mm, Features="Moisture Resistant", Height=0.45mm, Lead Free="Lead Free", Length=1.6mm, Military Standard=Not, Number of Pins=2, Number of Terminations=2, Packaging="Tape and Reel", Power Rating=100mW, REACH SVHC="No SVHC", RoHS Compliant=Yes, Series=RC, Technology="THICK FILM", Termination=SMD/SMT, Tolerance=1%, Voltage Rating (DC)=50V, Width=0.8mm
R5 R9 R10: library part CMP-2000-00873-2, "RES SMD 100K OHM 0.1% 1/10W 0603", Case Code (Imperial)=0603, Case Code (Metric)=1608, Max Operating Temperature=155°C, Max Power Dissipation=100mW, Min Operating Temperature=-55°C, Package Quantity=5000, Resistance=1kR, Resistance Tolerance=0.1%, Resistor Type="Thin Film", Temperature Coefficient=25ppm/°C, Voltage Rating=75V, Case/Package=0603, Construction=Rectangular, Contact Plating=Tin, Depth=0.8mm, Height=0.45mm, Length=1.6mm, Military Standard=Not, Mount="Surface Mount", Number of Pins=2, Number of Terminations=2, Packaging="Tape and Reel", Power Rating=100mW, Radiation Hardening=No, REACH SVHC="No SVHC", RoHS Compliant=Yes, Series=ERA-3A, Size Code=0603, Technology="METAL FILM", Termination=SMD/SMT, Tolerance=0.1%, Width=0.8mm
R6: library part CMP-2000-00466-1, Manufacturer=Panasonic, Part Number=ERJ-3EKF3741V
R7: library part CMP-2000-02920-2, "RES Thick Film, 15kΩ, 1%, 0.1W, 100ppm/°C, 0603", Case Code (Imperial)=0603, Case Code (Metric)=1608, Max Operating Temperature=155°C, Min Operating Temperature=-55°C, Package Quantity=5000, Power Rating=100mW, Resistance=15kR, Temperature Coefficient=100ppm/°C, Tolerance=1%, Voltage Rating=75V, Case/Package=0603, Composition="Thick Film", Contact Plating=Tin, Depth=0.85mm, Height=0.45mm, Lead Free="Lead Free", Length=1.55mm, Military Standard=Not, Mount="Surface Mount", Packaging="Tape and Reel", Radiation Hardening=No, Termination=SMD/SMT, Voltage Rating (DC)=75V, Weight=7.1E-05oz, Width=0.85mm
R8: library part CMP-2000-02958-2, "RES Thick Film, 18kΩ, 1%, 0.1W, 100ppm/°C, 0603", Case Code (Imperial)=0603, Case Code (Metric)=1608, Max Operating Temperature=155°C, Max Power Dissipation=100mW, Min Operating Temperature=-55°C, Package Quantity=10, Resistance=18kR, Temperature Coefficient=100ppm/°C, Tolerance=1%, Voltage Rating=75V, Case/Package=0603, Composition="Thick Film", Contact Plating=Tin, Depth=0.85mm, Features="Automotive AEC-Q200", Height=0.45mm, Lead Free="Lead Free", Length=1.55mm, Military Standard=Not, Mount="Surface Mount", Number of Pins=2, Number of Terminations=2, Packaging="Tape and Reel", Power Rating=100mW, Radiation Hardening=No, Termination=SMD/SMT, Voltage Rating (DC)=75V, Weight=7.1E-05oz, Width=0.033inch, Working Voltage=75V
RESET: library part CMP-10040-000028-1, "SWITCH TACTILE SPST-NO 0.05A 12V", Case/Package=SMD/SMT, Color=Black, Current Rating=50mA, Max Operating Temperature=60°C, Max Voltage Rating (DC)=12V, Min Operating Temperature=-20°C, Operating Force=200gf, Package Quantity=1000, Actuator Material=Nylon, Actuator Type=Standard, Contact Material=Bronze, Contact Plating=Silver, Depth=9mm, Illumination Type=Non-Illuminated, Lead Free="Lead Free", Length=6mm, Max Current Rating=50mA, Mechanical Life=100000Cycles, Mount="Surface Mount", Orientation=Straight, Packaging="Tape and Reel", REACH SVHC="No SVHC", Switch Function=Off-Mom, Termination="Gull Wing", Throw Configuration=SPST, Voltage Rating (DC)=12V
U1: library part CMP-0243-00118-2, "ARM Cortex-M4 32-bit MCU+FPU, 105 DMIPS, 128 kB Flash, 64 kB Internal RAM, 36 I/Os, 48-pin UFQFPN, -40 to 85 degC, Tray", I/Os (High Current)=36, Manufacturer=STMicroelectronics, Operating Frequency(F) (Processor speed) (MHz)=84, Supply Voltage(Vcc) max (V)=3.6, Supply Voltage(Vcc) min (V)=1.8, ComponentLink1Description="Manufacturer URL", ComponentLink1URL=http://www.st.com/web/en/home.html, ComponentLink2Description=Datasheet, ComponentLink2URL=http://www.st.com/st-web-ui/static/active/en/resource/technical/document/data_brief/DM00071938.pdf, ComponentLink3Description="Package Specification", ComponentLink3URL=http://www.st.com/st-web-ui/static/active/en/resource/technical/document/data_brief/DM00071938.pdf, Core="ARM Cortex-M4", DatasheetVersion="Rev. 1", FLASH Size (Prog) (kB)=128, Internal RAM Size (kB)=64, Mounting Technology="Surface Mount", PackageDescription="48-Pin Ultra Thin Fine Pitch Quad Flat No-Lead, 7 x 7 x 0.6 mm Body, 0.5 mm Pitch, Exposed Pad", PackageReference=UFQFPN48, PackageVersion="Rev. 1, 04/2013", Packing=Tray, PartNumber=STM32F401CBU6
U2: library part CMP-04918-000301-1, "IC REG BUCK ADJUSTABLE 3A 8SOPWR", Case/Package=SOIC, Max Input Voltage=28V, Max Operating Temperature=150°C, Max Output Voltage=25V, Min Input Voltage=4.5V, Min Operating Temperature=-40°C, Min Output Voltage=800mV, Output Current=3A, Quiescent Current=600uA, Switching Frequency=340kHz, Lead Free="Lead Free", Mount="Surface Mount", Number of Outputs=1, Number of Pins=8, Output Configuration=Positive, Output Type=Adjustable, Output Voltage=25V, Packaging="Cut Tape", REACH SVHC="No SVHC", RoHS Compliant=Yes, Synchronous Rectifier=Yes
U3: library part Component_1
U4: library part Component_2
Y1: library part CMP-20727-000002-1, "CRYSTAL 40.0000MHZ 8PF SMD", Frequency=40MHz, Load Capacitance=8pF, Manufacturer="Kyocera International Inc. Electronic Components", Package=CX2016DB, Temperature="-30°C to +85°C", Temperature Range High=+85°C, Temperature Range Low=-30°C, Tolerance=15ppm, Automotive=No, Category=Crys, ComponentLink2Description=Datasheet, ComponentLink2URL=https://global.kyocera.com/prdct/electro/product/pdf/cx2016db_e.pdf, Device Class L1="Passive Components", Device Class L2="Crystals / Oscillators", Device Class L3=Crystals, Digikey Description="CRYSTAL 40.0000MHZ 8PF SMD", Esr=50Ω, Height=0.45mm, Lead Free=Yes, Manufacturer Part Number=CX2016DB40000D0FLJCC, Mouser Description="Crystal 40MHz 8pF 4-Pin SMD T/R", Octopart=https://octopart.com/cx2016db40000d0fljcc-avx+%2F+kyocera-71139660, RoHS=TRUE, Series=CX2016DB, Stability=15ppm

## Via types
v1: diameter 24.02, hole 12.01, Top Layer to Bottom Layer, 49 vias
v2: diameter 19.68, hole 7.87, Top Layer to Bottom Layer, 25 vias

## Nets (pads, with @x,y where several pads share a name; then routed paths per layer and width w, separated by ;. In a path a pad name is that pad's centre, name@x,y a point inside that pad or via, vN(x,y) a via of type N, cw(c..) or ccw(c..) an arc to the next point about the centre after c; other vN are vias at no path point)
+3.3V: C1.1 C2.1 C3.1 C4.1 C18.2 C19.1 C20.1 J1.2 J3.1 R1.2 R10.1 U1.1 U1.9 U1.24 U1.36 U1.48 U3.10 U4.5 | length 6881.3
  Top Layer w10: J3.1 3082.64,1512.36 3075,1520 3075,1870 ; v1@3270,2481.43 R1.2 ; v1(3272.31,2481.43) 3268.52,2481.43 3262.36,2475.28 3260.28,2475.28 3096.46,2311.46 3096.46,2249.03 3135,2210.49 J1.2 3086.57,2166.57 3075,2155 3075,1870 ; v1(3640,1420) 3669.21,1390.79 U1.9 ; v1(3647.31,1311.43) 3647.31,1277.69 3737.99,1187.01 3762.99,1187.01 v1(3765,1185) ; v1(3727.31,1606.43) 3775.3,1606.43 3776.73,1605 ; U1.1 3754.92,1548.27 3755,1548.35 3755,1564.14 3760.86,1570 3776.65,1570 3776.73,1570.08 U1.48 3776.73,1605 ; U1.24 3993.27,1287.6 U1.24@3995,1285.87 ; U4.5 4095.09,2882.4 C18.2 4145.59,2871.66 4149.38,2875.45 4176.19,2875.45 4180.82,2870.82 4180.82,2864.27 v1(4183.5,2861.59) ; U1.36 4037.23,1548.27 4037.31,1548.35 v1(4037.31,1631.43) ; C20.1 C19.1 U1.24@3995,1285.87 ; R10.1 4542.49,1757.49 4530,1745 4530,1290 4520.94,1280.94 U3.10 3999.92,1280.94 U1.24@3995,1285.87 ; 3075,1870 3085,1880 3370,1880 3415,1835 3489.69,1835 C1.1 C2.1 C3.1 C4.1 3805,1835.31 3805,1760 3776.73,1731.73 3776.73,1605
  Bottom Layer w10: v1(3272.31,2481.43) 3490.88,2700 4145,2700 4185,2740 v1@4185,2860 ; v1@3640,1310 v1(3640,1420) 3640,1550 3696.43,1606.43 v1(3727.31,1606.43) ; v1(3765,1185) 3890,1185 3910,1205 3965.88,1205 v1(3992.31,1231.43) ; v1(3802.31,1761.43) 4028.57,1761.43 4037.31,1752.69 v1(4037.31,1631.43)
+5: C12.2 C13.2 C17.2 J2.2 L1.2 R5.1 R9.1 U4.1 U4.3 | length 3354.1
  Top Layer w10: U4.3 3923.59,2765.86 3912.73,2755 3765,2755 3745,2775 3745,2855 3760,2870 C17.2 3865,2870 3880,2885 3920.99,2885 U4.1 3930,2888.82 3930,3010 3965,3045 4640,3045 4686.42,2998.58 L1.2@4686.42,2922.76 ; C12.2 C13.2 C13.2@4807.52,2568.5 ; L1.2 L1.2@4686.42,2922.76 ; J2.2 4990.04,2399.96 4950,2440 4950,2540 4921.5,2568.5 C13.2@4807.52,2568.5 ; R9.1 5112.49,1952.49 5122.07,1962.07 5122.07,1968.28 5135,1981.21 v1(5135,1985) ; L1.2@4686.42,2922.76 4728.66,2965 4770,2965 4777.51,2972.51 R5.1 4917.49,2972.51 4930,2960 4930,2690.98 C13.2@4807.52,2568.5
  Bottom Layer w10: J2.2 5125,2335.63 5125,2105 5135,2095 v1(5135,1985)
+9V: 9V.2 C10.1 C11.1 R4.2 U2.2 | length 920.8
  Top Layer w10: C11.1 C10.1 3550.32,2565.32 3560,2575 R4.2@3678.46,2575 ; 9V.2 3599.21,2720.79 3678.46,2641.54 R4.2@3678.46,2575 ; U2.2 3780,2530 3736.54,2573.46 R4.2 R4.2@3678.46,2575
ADCIN: J1.3 U1.10 | length 1363.2
  Top Layer w10: v1(3615,1385) 3618.79,1385 3632.69,1371.1 U1.10
  Bottom Layer w10: J1.3 3240,2265 3390,2115 3390,1790 3445,1735 3590,1735 3605,1720 3605,1397.87 3615,1387.87 v1(3615,1385)
AUX: U1.28 U3.9 | length 287.8
  Top Layer w10: U1.28 4089.21,1390.79 v1@4110,1370 ; v1(4230,1330) 4294.06,1330 U3.9
  Bottom Layer w10: v1(4120,1370) 4160,1330 v1(4230,1330)
BOOT0: R2.2 U1.44 | length 256.7
  Top Layer w10: U1.44 3855.47,1640.96 3855,1641.44 3855,1690 3890.83,1725.83 R2.2
BOOT1: R3.2 U1.20 | length 237.3
  Top Layer w10: R3.2 3798.56,1134.15 3814.15,1134.15 3914.53,1234.53 U1.20
GND: 9V.1 C1.2 C2.2 C3.2 C4.2 C5.2 C6.2 C7.1 C8.2 C10.2 C11.2 C12.1 C13.1 C14.1 C15.2 C16.1 C17.1 C18.1 C19.2 C20.2 D1.1 DS1.2 J1.1 J3.4 Q1.1 R2.1 R3.1 R7.1 R8.1 RESET.3 RESET.4 U1.8 U1.23 U1.35 U1.47 U1.49 U2.4 U2.9 U3.1 U3.2 U3.3 U3.4 U3.11 U3.13 U3.19 U3.20 U3.22 U4.2 Y1.2 Y1.4 | length 5381
  Top Layer w10: v1(3118.9,2473.9) 3169.02,2473.9 RESET.3 ; C8.2 3268.5,2786.5 RESET.4 3169.33,2786.58 v1(3169.33,2848.49) 3169.33,2939.33 3215.67,2985.67 9V.1 ; v1(3413.9,1373.9) 3443.91,1373.9 3445,1372.81 ; C5.2 3450.82,1536.18 3450.82,1490.82 3445,1485 3445,1446.03 Y1.2 3445,1395.62 3445,1372.81 ; C7.1 3455.82,1313.82 3455.82,1339.18 3445,1350 3445,1372.81 ; v1(3470,1985) 3470,1947.68 3477.09,1940.59 3477.09,1935.67 3490.91,1921.85 C1.2 C2.2 C3.2 C4.2 3822.68,1910 3884.97,1910 3890.83,1904.14 R2.1 ; Y1.4 3555,1429.18 3562.04,1436.22 3571.22,1436.22 v1(3573.9,1438.9) ; C10.2 C11.2 3611.34,2373.66 3624.53,2360.47 R7.1 ; v1(3725,1105) 3754.47,1075.53 3788.88,1075.53 R3.1 4104.76,1074.41 C20.2 4105.35,1075 4225,1075 4295,1145 U3.11 ; U1.8 3784.61,1410.47 v2(3798.39,1396.69) ; v1(3775,2815) 3829.15,2815 C17.1 3865.59,2816.68 3888.9,2839.99 3918.58,2839.99 U4.2 4055,2845 4065.84,2834.16 4092.88,2834.16 4105.83,2821.21 C18.1 ; U1.47 3796.42,1528.58 v2(3798.39,1526.61) ; v1(3807.31,2431.43) 3808.03,2430.72 3858.93,2430.72 U2.4 3885.87,2430 3904.84,2448.98 3915.97,2448.98 3950.83,2483.84 U2.9 ; v2(3971.61,1353.39) 3973.58,1351.42 U1.23 ; v2(3971.61,1526.61) 3973.58,1528.58 U1.35 4083.58,1528.58 4090,1535 4096.21,1535 4110.1,1548.9 v1(4113.9,1548.9) ; C14.1@4153.86,2411.46 C14.1 ; C16.1@4243.86,2411.46 C16.1 4247.8,2413.43 4284.79,2376.43 v1(4287.31,2376.43) 4289.99,2379.12 4289.99,2384.33 4322.05,2416.38 C15.2 ; U3.4 4296.1,1578.9 v1(4353.9,1578.9) ; C13.1 C12.1 4580,2332.33 v1(4580,2405) 4520,2405 4475,2450 4475,2610 4490,2625 4814.97,2625 4830.83,2640.86 R8.1 ; U3.13 4935.94,1280 4985,1280 4998.9,1293.9 v1(4998.9,1578.9) 4936.1,1578.9 U3.19 ; U3.20 4937.01,2023.9 v1(4993.9,2023.9) 4993.9,2111.1 4983.11,2121.89 U3.22 ; DS1.2 5195.49,1768.41 5243.41,1768.41 v1(5243.9,1768.9) ; D1.1 5196.28,1960.18 5242.62,1960.18 v1(5243.9,1958.9)
  Bottom Layer w10: v1(3792.31,1226.43) 3792.31,1344.69 3798.39,1350.77 v2(3798.39,1353.39)
  other v1: 4157.31,2391.43 3967.31,2546.43
  other v2: 3841.69,1353.39 3885,1353.39 3928.31,1353.39 3841.69,1396.69 3885,1396.69 3928.31,1396.69 3971.61,1396.69 3798.39,1440 3841.69,1440 3885,1440 3928.31,1440 3971.61,1440 3798.39,1483.31 3841.69,1483.31 3885,1483.31 3928.31,1483.31 3971.61,1483.31 3841.69,1526.61 3885,1526.61 3928.31,1526.61
M0: U1.27 U3.5 | length 445.7
  Top Layer w10: U1.27 4078.9,1371.1 4120,1330 4160,1330 4170,1340 4170,1465 4235.94,1530.94 U3.5
M1: U1.26 U3.6 | length 424.6
  Top Layer w10: U1.26 4068.58,1351.42 4110,1310 4170,1310 4190,1330 4190,1440 4230.94,1480.94 U3.6
NetC5_1: C5.1 U1.5 Y1.1 | length 318
  Top Layer w10: Y1.1 3545.35,1495.98 ; C5.1 3545.35,1495.98 ; U1.5 3571.8,1469.53 3545.35,1495.98
NetC6_1: C6.1 U1.22 | length 197
  Top Layer w10: C6.1 3887.95,1135.51 3897.72,1145.28 3897.72,1148.23 3953.9,1204.41 U1.22
NetC7_2: C7.2 U1.6 Y1.3 | length 361.5
  Top Layer w10: Y1.3 3535.51,1355.51 ; C7.2 3550.35,1340.67 3535.51,1355.51 ; U1.6 3629.84,1449.84 3535.51,1355.51
NetC9_1: C9.1 U2.1 | length 399.3
  Top Layer w10: U2.1 3859.65,2604.14 3865.5,2610 v1(3910,2610) ; v1(3960,2395) 3990,2395 4006.18,2378.82 C9.1
  Bottom Layer w10: v1(3910,2610) 3935,2585 3935,2420 v1(3960,2395)
NetC9_2: C9.2 L1.1 U2.3 | length 1410.5
  Top Layer w10: U2.3 3805,2480 3770,2445 3770,2365 3790,2345 C9.2 3925,2344.52 3925,2295 3940.63,2279.37 v1(3941.79,2279.37) ; v1(4285,2895) 4348.58,2895 L1.1
  Bottom Layer w10: v1@3940,2280 4190,2280 4230,2320 4230,2840 v1(4285,2895)
NetC14_2: C14.2 U2.8 | length 207.2
  Top Layer w10: U2.8 4125,2580 4155.83,2549.17 C14.2
NetC15_1: C15.1 R6.1 | length 86.1
  Top Layer w10: R6.1 4325,2533.54 C15.1
NetC16_2: C16.2 R6.2 U2.6 | length 461.6
  Top Layer w10: U2.6 4104.14,2480 4110,2474.14 4110,2380 4124.02,2365.98 4195.98,2365.98 4205,2375 4205,2427.71 4243.86,2466.57 C16.2 4245.83,2534.37 R6.2
NetD1_2: D1.2 R9.2 | length 115.4
  Top Layer w10: R9.2 5081.04,2018.54 D1.2
NetDS1_1: DS1.1 R10.2 | length 116
  Top Layer w10: R10.2 5082.49,1825 DS1.1
NetQ1_2: Q1.2 U1.29 | length 1460
  Top Layer w10: U1.29 4100.73,1410.47 4106.21,1405 v1(4110,1405)
  Bottom Layer w10: Q1.2 3520,2180 3530,2190 3990,2190 4080,2100 4080,1415 4087.32,1407.68 4107.32,1407.68 v1(4110,1405)
NetR4_1: R4.1 R7.2 U2.7 | length 867.9
  Top Layer w10: R7.2 R4.1 3738.46,2506.54 v1(3760,2485) ; U2.7 4100,2530 v1@4105,2525
  Bottom Layer w10: v1(3760,2485) 3760,2400 3795,2365 4120,2365 4130,2375 4130,2500 v1(4110,2520)
NetR5_2: R5.2 R8.2 U2.5 | length 1346
  Top Layer w10: U2.5 4085,2430 4090.86,2424.14 4090.86,2364.14 4105,2350 4355,2350 4370,2365 4370,2610 4405,2645 4720,2645 4770,2695 4770,2790 4787.1,2807.1 R8.2 R5.2
NRST: C8.1 R1.1 RESET.1 RESET.2 U1.7 | length 2746.9
  Top Layer w10: RESET.1 RESET.2@2992.25,2781.57 ; RESET.2 RESET.2@2992.25,2781.57 ; v1(3318.65,2034.58) 3318.65,2569.14 3307.21,2580.59 R1.1 C8.1 3069.53,2704.29 RESET.2@2992.25,2781.57 ; v1(3690,1420) 3693.79,1420 3703.95,1430.16 U1.7
  Bottom Layer w10: v1@3321.34,2033.15 3321.34,1278.66 3395,1205 3660,1205 3690,1235 v1(3690,1420)
RXD: U1.30 U3.7 | length 276.7
  Top Layer w10: U1.30 4126.36,1430.16 4131.21,1435 v1(4135,1435) ; v1(4230,1430) 4294.06,1430 U3.7
  Bottom Layer w10: v1(4135,1435) 4137.5,1432.5 4227.5,1432.5 v1(4230,1430)
SDIO: J3.3 U1.34 | length 1262.9
  Top Layer w10: J3.3 3719.21,1709.21 v1@3720,1710 ; v1(3965,1705) 4105,1705 4145,1665 4145,1520 4133.9,1508.9 U1.34
  Bottom Layer w10: v1(3730,1705) v1(3965,1705)
Speaker: J2.1 Q1.3 | length 1923.2
  Top Layer w10: Q1.3 3900,2130 3905,2135 4015,2135 4100,2220 5105,2220 5145,2260 5145,2450 5105,2490 5069.05,2490 J2.1
SWCLK: J3.2 U1.37 | length 935
  Top Layer w10: J3.2 3215.04,1665 3570,1665 3585,1650 v1@3730,1650 ; v1(3962.31,1651.43) 3964.99,1648.75 3986.25,1648.75 3993.27,1641.73 U1.37
  Bottom Layer w10: v1(3727.31,1651.43) v1(3962.31,1651.43) 3963.57,1651.43 v1@3965,1650
TXD: U1.31 U3.8 | length 560.3
  Top Layer w10: U1.31 4094.84,1449.84 v1@4115,1470 ; v1(4230,1380) 4294.06,1380 U3.8
  Bottom Layer w10: v1(4120,1470) 4123.79,1470 4133.79,1480 4310,1480 4335,1455 4335,1405.86 4329.14,1400 4250,1400 v1(4230,1380)
pads on no net: U1.2 U1.3 U1.4 U1.11 U1.12 U1.13 U1.14 U1.15 U1.16 U1.17 U1.18 U1.19 U1.21 U1.25 U1.32 U1.33 U1.38 U1.39 U1.40 U1.41 U1.42 U1.43 U1.45 U1.46 U3.12 U3.14 U3.15 U3.16 U3.17 U3.18 U3.21 U4.4
copper on no net: | length 9550.6
  Top Layer w10: 5311.53,1035 5313.5,3079.95 ccw(c5094.95,3079.95) 5094.95,3298.5 3048.19,3298.77 ccw(c3048.19,3082.07) 2831.5,3082.07 2831.22,1034.71 ccw(c3047.61,1034.71) 3047.61,818.32 5095,818.19 ccw(c5095,1035) 5311.81,1035

## Polygon pours and split planes (outlines as drawn)
GND on Bottom Layer "GND_L02_P000" (solid, pour order 0): 2831.22,1034.71 ccw(c3047.61,1034.71) 3047.61,818.32 5095,818.19 ccw(c5095,1035) 5311.81,1035 5311.53,1035 5313.5,3079.95 ccw(c5094.95,3079.95) 5094.95,3298.5 3048.19,3298.77 ccw(c3048.19,3082.07) 2831.5,3082.07
GND on Top Layer "GND_L01_P001" (solid, pour order 1): 2831.22,1034.71 ccw(c3047.61,1034.71) 3047.61,818.32 5095,818.19 ccw(c5095,1035) 5311.81,1035 5311.53,1035 5313.5,3079.95 ccw(c5094.95,3079.95) 5094.95,3298.5 3048.19,3298.77 ccw(c3048.19,3082.07) 2831.5,3082.07

## Silkscreen, mask and mechanical layers (free items; w line width, h text height)
Top Overlay:
  text "GND" at 3509.36,3105 h60 r90
  text "GND" at 5180,2485.64 h60
  text "ALARM" at 5185,2390 h30
  text "ADCIN" at 2850,2245.64 h60
  text "3.3V" at 2905,2140.64 h60
  text "GND" at 2895,2045.64 h60
  text "GND" at 2895,1790.64 h60
  text "SDIO" at 2885,1680.64 h60
  text "SWCLK" at 2835,1585.64 h60
  text "3.3V" at 2895,1490.64 h60
Mechanical 1:
  circle w10: c5095,3082.24 r118.11
  circle w10: c3047.76,3082.24 r118.11
  circle w10: c3047.76,1035 r118.11
  circle w10: c5095,1035 r118.11